# Altium PCB ej_2.PcbDoc
Units mm, origin at the board's own origin, x right, y up, seen from the top; angles counter-clockwise.
Board outline 99.95 x 100.08 mm, 2 copper layers (Top Layer, Bottom Layer); 15 components, 22 nets, 112 pads, 0 vias.
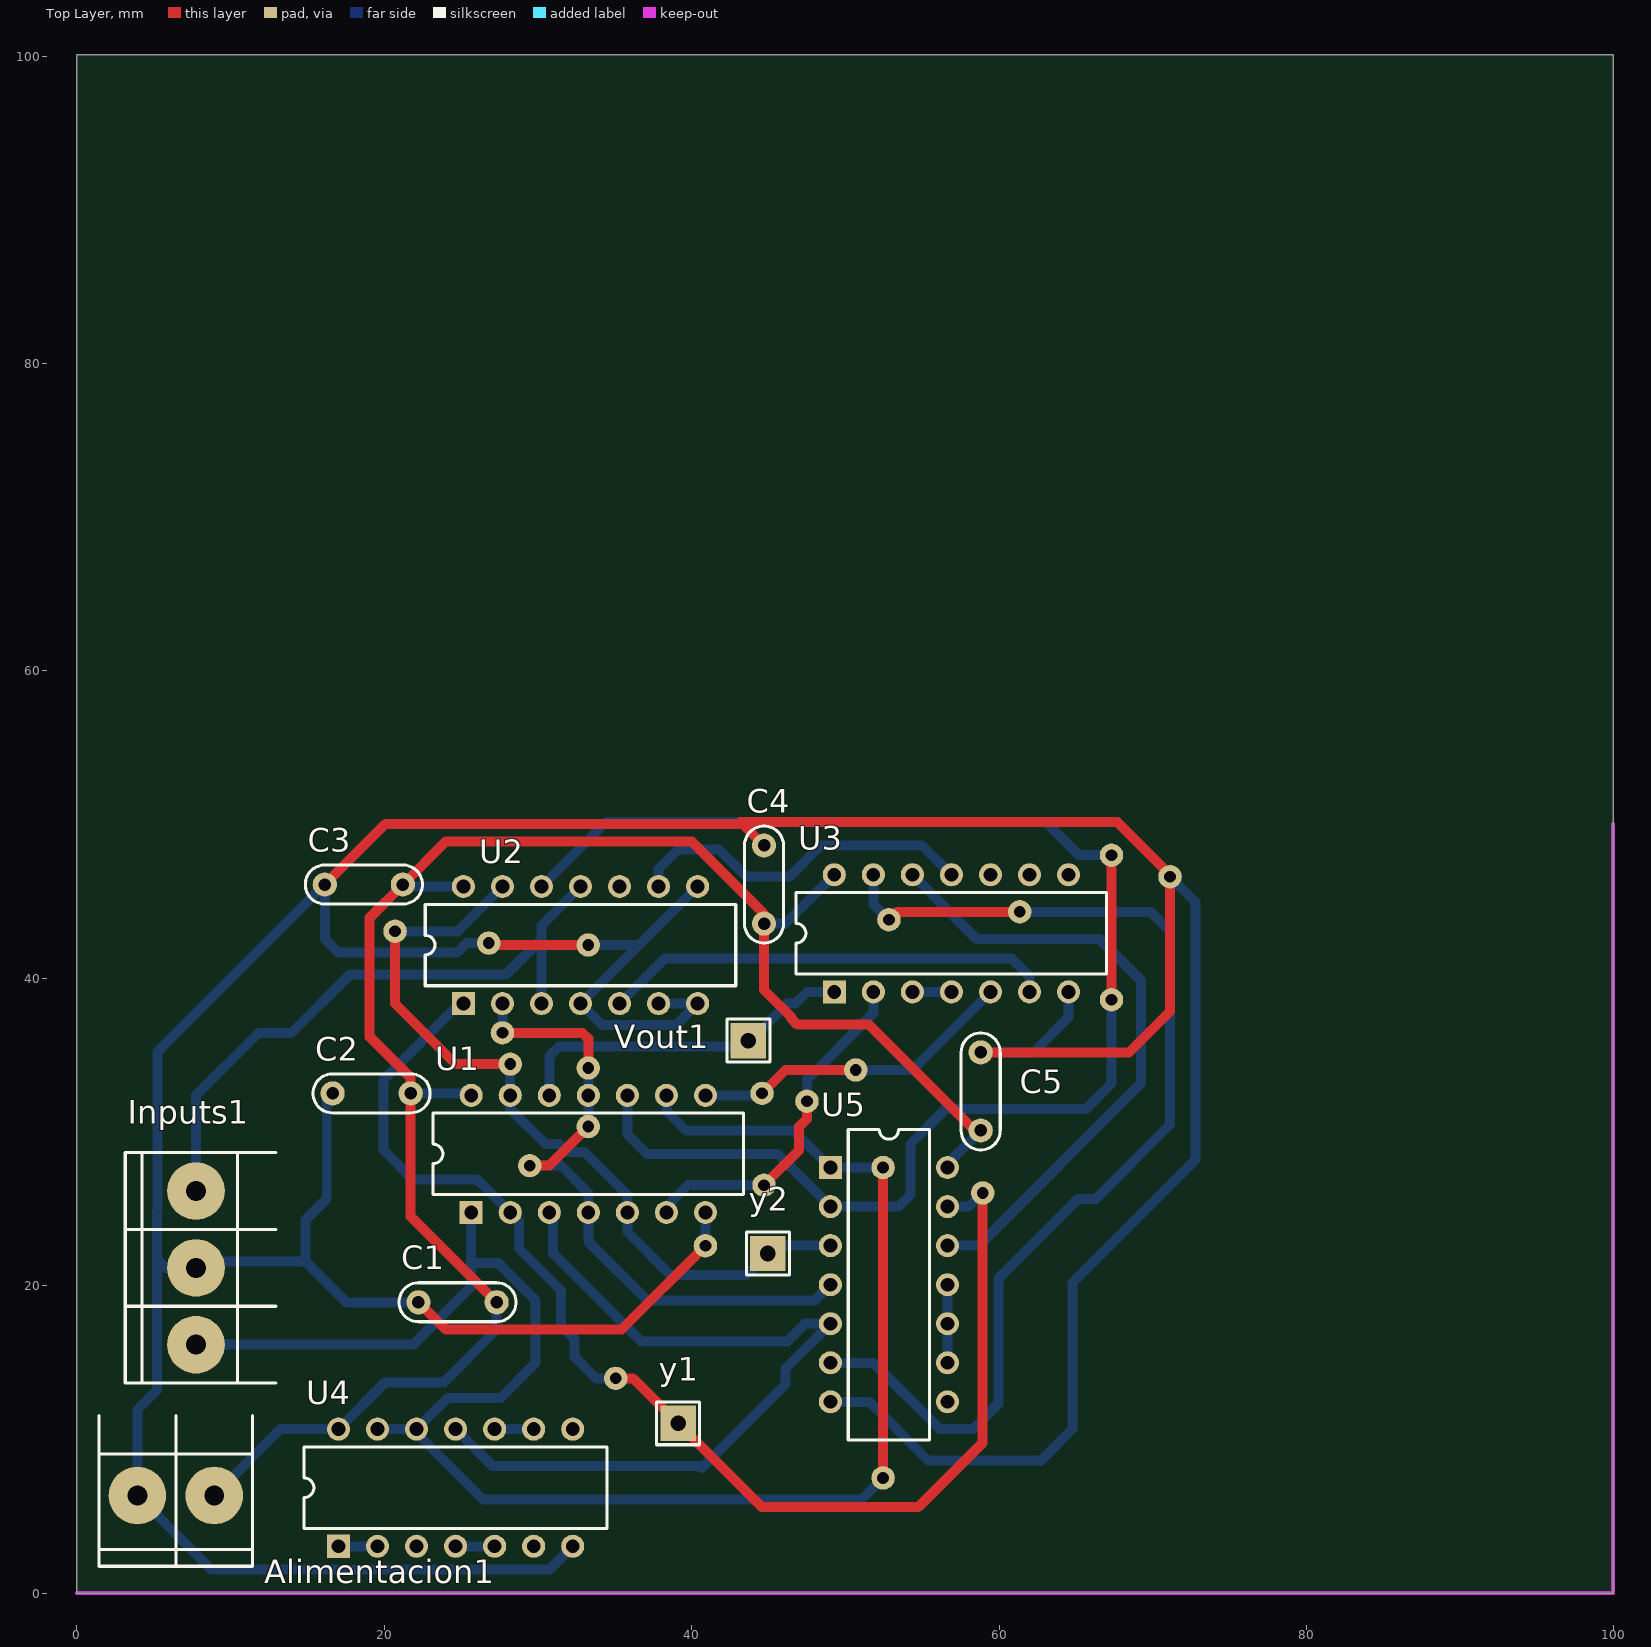
[diagram p0: Top Layer view]
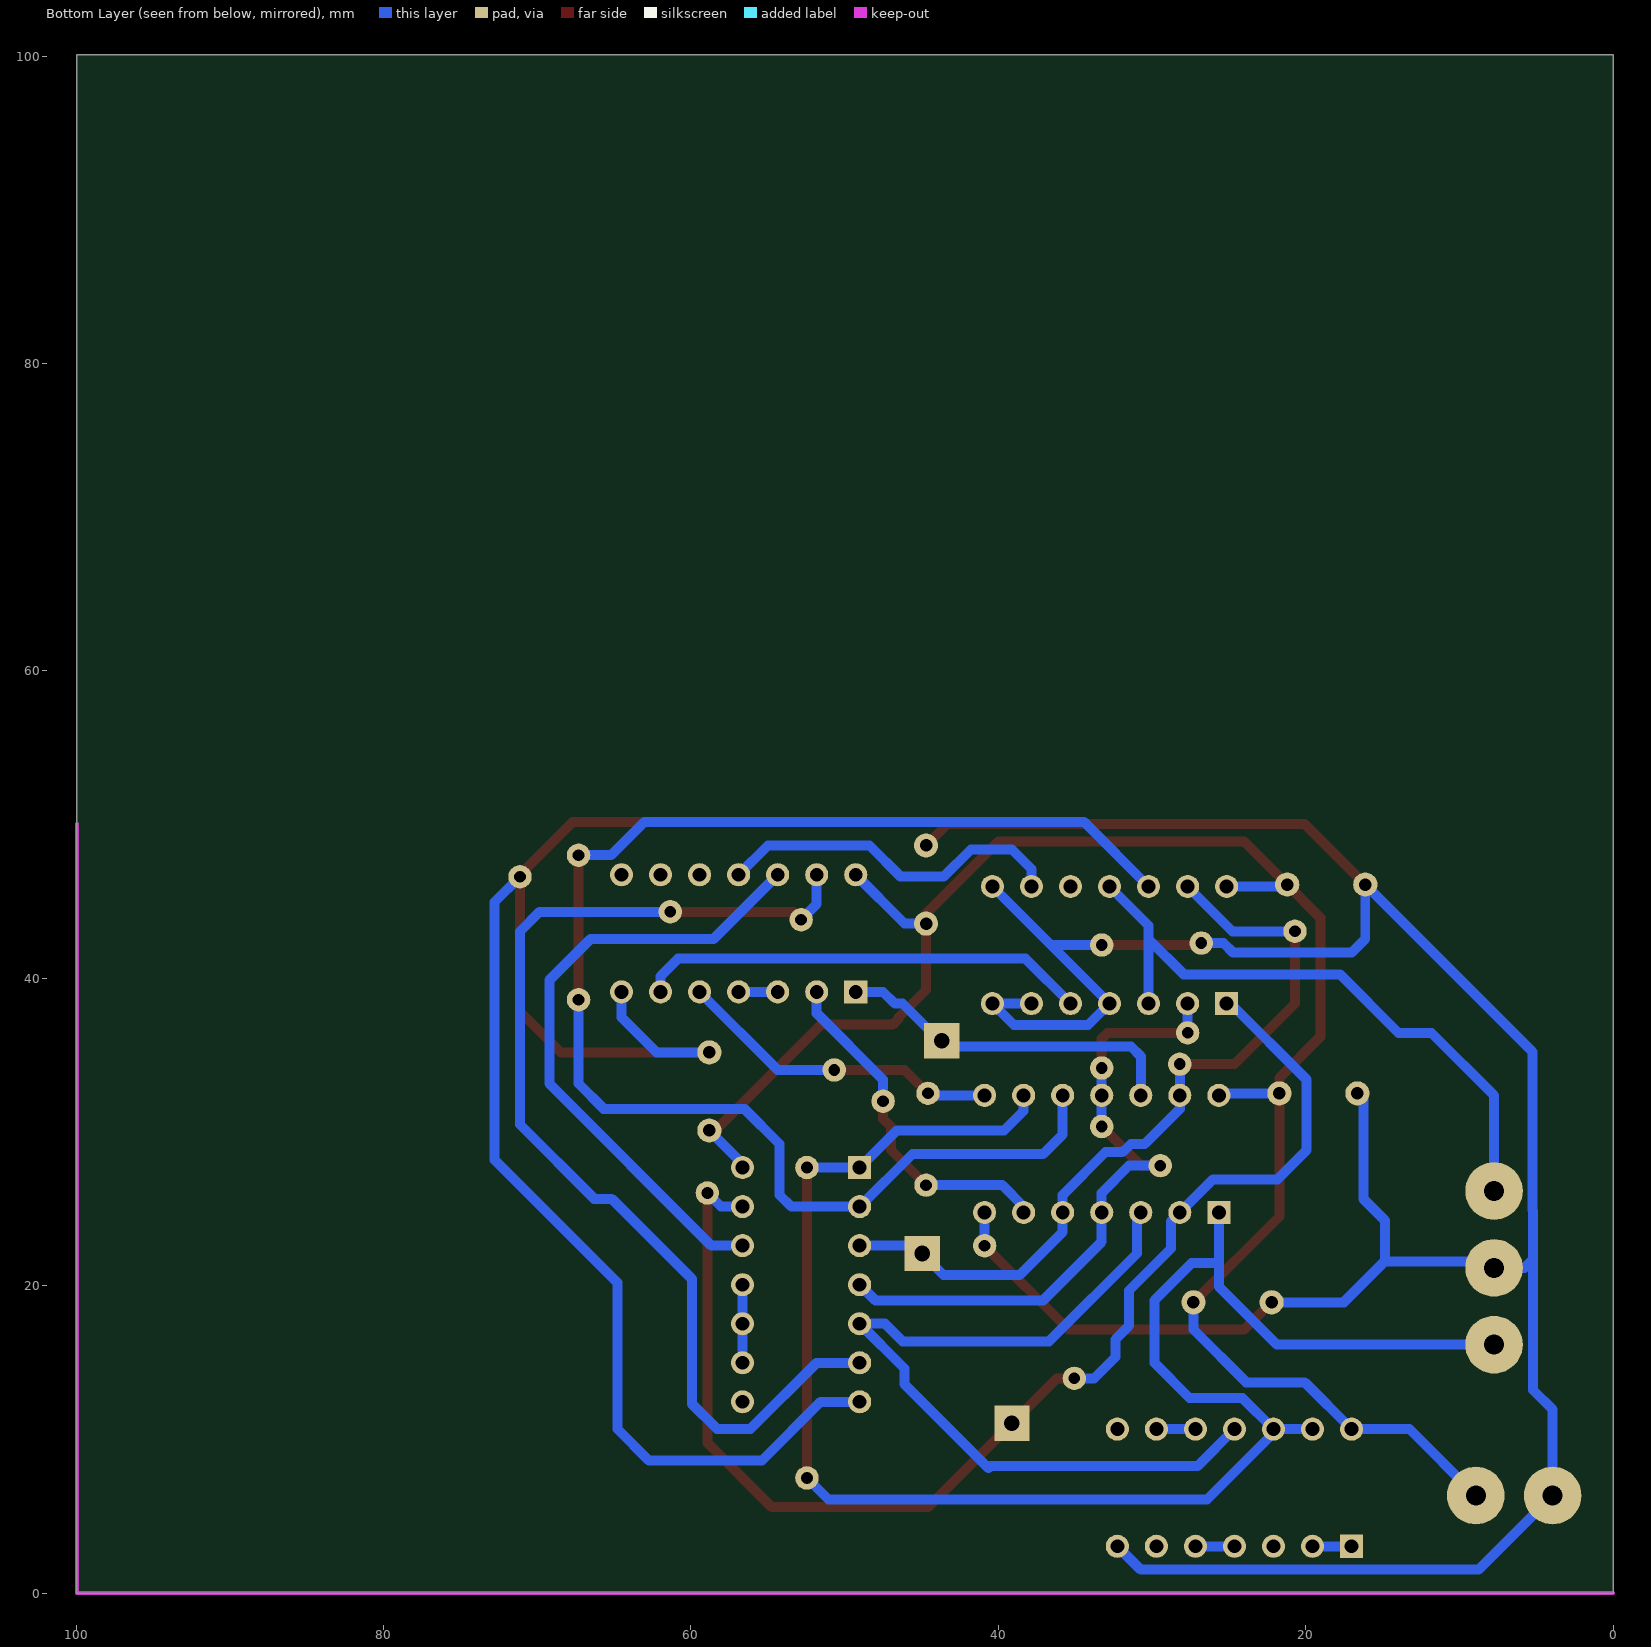
[diagram p1: Bottom Layer view, seen from below]
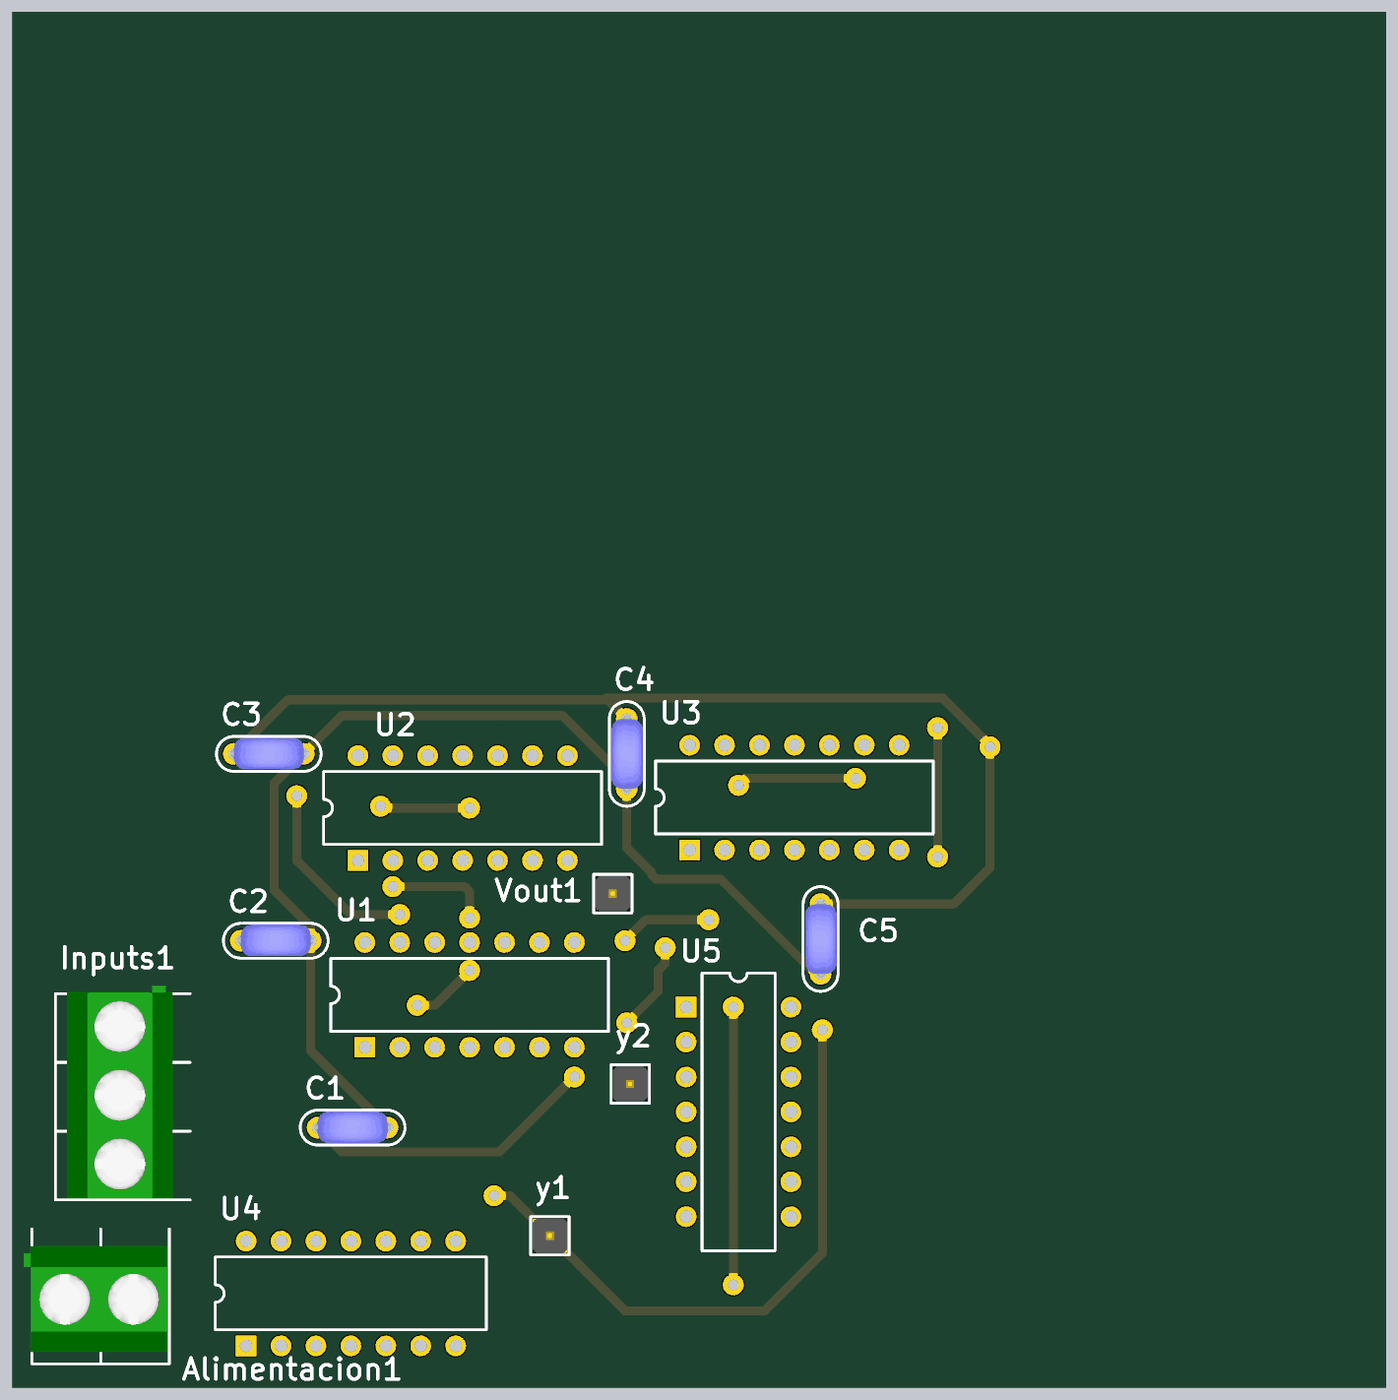
[diagram p2: 3D render of the assembled board from above, using the file's embedded part models]

## Layer stack, top to bottom
Top Solder: solder mask 0.0102, Solder Resist, Dk 3.5
Top Layer: signal copper 0.0356
Dielectric 1: dielectric 0.32, FR-4, Dk 4.8
Bottom Layer: signal copper 0.0356
Bottom Solder: solder mask 0.0102, Solder Resist, Dk 3.5

## Board outline
0,0 99.949,0 99.949,100.076 0,100.076

## Design rules (kind name [scope] priority, off if disabled: settings)
Clearance [All] p1: gap=0.3 ignorepadtopadclearanceinfootprint=FALSE
PolygonConnect [All] p1: connectstyle=Relief reliefconductorwidth=0.254 reliefentries=4 polygonreliefangle="90 Angle" airgapwidth=0.254
RoutingVias [All] p1: holewidth=0.5 width=2 viastyle="Through Hole" minholewidth=0.5 minwidth=2 maxholewidth=0.5 maxwidth=2
SolderMaskExpansion [All] p1: expansion=0.102
Width [All] p1: maxlimit=0.65 minlimit=0.65 preferedwidth=0.65
30 further rules are at their usual default settings.

## Components (designator, comment, footprint, x,y, rotation, side; value= is the part's Value field where it differs from the comment)
Alimentacion1 "Alimentacion" BORNERA2 6.437,6.35 r90 top
C1 "CAP" CAP200 24.765,18.923 r180 top
C2 "CAP" CAP200 19.177,32.512 r180 top
C3 "CAP" CAP200 18.669,46.101 r180 top
C4 "CAP" CAP200 44.704,46.101 r90 top
C5 "CAP" CAP200 58.801,32.639 r90 top
Inputs1 "BORNERA 3" BORNERA3 7.747,21.162 r0 top
U1 "M74HC11B1R" DIP14 33.274,28.575 r0 top
U2 "HCC4013BF" CDIP14 32.766,42.164 r0 top
U3 "M74HC32B1R" DIP14 56.896,42.926 r0 top
U4 "SN74AHC00N" N014 24.638,6.858 r0 top
U5 "M74HC11B1R" DIP14 52.832,20.066 r270 top
Vout1 "Vout" TPTH 43.688,35.941 r0 top
y1 "y1_now" TPTH 39.116,11.049 r0 top
y2 "y2_now" TPTH 44.958,22.098 r0 top

## Footprints (in the part's own frame and the unit in brackets; to place one, negate y for a bottom-side part, rotate by r counter-clockwise, add the part's x,y. Pads: shape width x height; smd on the part's side, far side on the other; paste and mask are expansions set on the pad)
BORNERA2 [mm] "Bornera con Tornillos 5mm separación"
  round 3.75 hole 1.3: 1(0,2.5) 2(0,-2.5)
  silkscreen extent -4.6,-5 5.2,5, body extent -3.76,-4.89 3.94,5.61, height 10
BORNERA3 [mm] "Bornera con Tornillos 5mm separación"
  round 3.75 hole 1.3: 1(0,5) 2(0,0) 3(0,-5)
  silkscreen extent -4.6,-7.5 5.2,7.5, body extent -3.76,-7.39 3.94,8.11, height 10.05
CAP200 [mil]
  round 62 hole 32: 1(-100,0) 2(100,0)
  silkscreen extent -150,-50 150,50, body extent -110,-46 110,44, height 246
CDIP14 [mm] "DIP; 14 Leads; Row Spacing 7.62 mm; Pitch 2.54 mm"
  rect 1.5x1.5 hole 0.9: 1(-7.62,-3.81)
  round 1.5 hole 0.9: 2(-5.08,-3.81) 3(-2.54,-3.81) 4(0,-3.81) 5(2.54,-3.81) 6(5.08,-3.81) 7(7.62,-3.81) 8(7.62,3.81) 9(5.08,3.81) 10(2.54,3.81) 11(0,3.81) 12(-2.54,3.81) 13(-5.08,3.81) 14(-7.62,3.81)
  silkscreen extent -10.1,-2.65 10.1,2.65
DIP14 [mm] "DIP; 14 Leads; Row Spacing 7.62 mm; Pitch 2.54 mm"
  rect 1.5x1.5 hole 0.9: 1(-7.62,-3.81)
  round 1.5 hole 0.9: 2(-5.08,-3.81) 3(-2.54,-3.81) 4(0,-3.81) 5(2.54,-3.81) 6(5.08,-3.81) 7(7.62,-3.81) 8(7.62,3.81) 9(5.08,3.81) 10(2.54,3.81) 11(0,3.81) 12(-2.54,3.81) 13(-5.08,3.81) 14(-7.62,3.81)
  silkscreen extent -10.1,-2.65 10.1,2.65
N014 [mm] "DIP; 14 Leads; Row Spacing 7.62 mm; Pitch 2.54 mm"
  rect 1.5x1.5 hole 0.9: 1(-7.62,-3.81)
  round 1.5 hole 0.9: 2(-5.08,-3.81) 3(-2.54,-3.81) 4(0,-3.81) 5(2.54,-3.81) 6(5.08,-3.81) 7(7.62,-3.81) 8(7.62,3.81) 9(5.08,3.81) 10(2.54,3.81) 11(0,3.81) 12(-2.54,3.81) 13(-5.08,3.81) 14(-7.62,3.81)
  silkscreen extent -9.85,-2.65 9.85,2.65
TPTH [mm]
  rect 2.3x2.3 hole 1.016: 1(0,0)
  silkscreen extent -1.4,-1.4 1.4,1.4, body extent -1.27,-1.27 1.27,1.27, height 6.04

## Part data
Alimentacion1: library part "BORNERA 2"
U1 U5: "Triple 3-Input AND Gate", ComponentLink1Description="Manufacturer Link", ComponentLink1URL=http://www.st.com/, ComponentLink2Description=Datasheet, ComponentLink2URL=http://www.st.com/stonline/products/literature/ds/1890/m74hc11.pdf, DatasheetVersion=Feb-1993, LatestRevisionDate=06-Jun-2005, LatestRevisionNote="Stylized 3D Model Added.", PackageDescription="DIP; 14 Leads; Row Spacing 7.62 mm; Pitch 2.54 mm", PackageReference=DIP14, PackageVersion=Jan-1997, Published=8-Jun-2000, Publisher="Altium Limited"
U2: "Dual D-Type Flip-Flop", ComponentLink1Description="Manufacturer Link", ComponentLink1URL=http://www.st.com/, DatasheetVersion=Jun-1989, LatestRevisionDate=06-Jun-2005, LatestRevisionNote="Stylized 3D Model Added.", PackageDescription="DIP; 14 Leads; Row Spacing 7.62 mm; Pitch 2.54 mm", PackageReference=CDIP14, Published=8-Jun-2000, Publisher="Altium Limited"
U3: "Quad 2-Input OR Gate", ComponentLink1Description="Manufacturer Link", ComponentLink1URL=http://www.st.com/, ComponentLink2Description=Datasheet, ComponentLink2URL=http://www.st.com/stonline/products/literature/ds/1944/m74hc32.pdf, DatasheetVersion=Dec-1992, LatestRevisionDate=06-Jun-2005, LatestRevisionNote="Stylized 3D Model Added.", PackageDescription="DIP; 14 Leads; Row Spacing 7.62 mm; Pitch 2.54 mm", PackageReference=DIP14, PackageVersion=Jan-1997, Published=8-Jun-2000, Publisher="Altium Limited"
U4: "Quadruple 2-Input Positive-NAND Gate", ComponentLink1Description="Manufacturer Link", ComponentLink1URL=http://www.ti.com/, ComponentLink2Description=Datasheet, ComponentLink2URL=http://www-s.ti.com/sc/ds/sn74ahc00.pdf, ComponentLink3Description="Packaging Specification", ComponentLink3URL=http://focus.ti.com/lit/ml/mpdi002c/mpdi002c.pdf, DatasheetVersion=Jun-1998, LatestRevisionDate=04-Mar-2005, LatestRevisionNote="Stylized 3D Model Added.", PackageDescription="DIP; 14 Leads; Row Spacing 7.62 mm; Pitch 2.54 mm", PackageReference=N014, PackageVersion=Oct-1995, Published=8-Jun-2000, Publisher="Altium Limited"
Vout1 y1 y2: library part TP

## Free pads (board coordinates)
  round 1.524 hole 0.762: 12(33.274,34.163) 13(27.686,36.449) 14(28.194,34.417) 15(20.701,43.053) 16(20.701,43.053) 17(44.577,32.512) 18(50.673,34.036) 19(44.704,26.543) 20(47.498,32.004) 21(52.451,7.493) 22(52.451,27.686) 23(29.464,27.813) 25(33.274,30.353) 26(67.31,38.608) 27(67.31,48.006) 28(33.274,42.164) 29(26.797,42.291) 30(58.928,26.035) 31(35.052,13.97) 32(35.052,13.97) 33(40.894,22.606) 34(52.832,43.815) 35(61.341,44.323) 36(71.12,46.609)

## Nets (pads, with @x,y where several pads share a name; then routed paths per layer and width w, separated by ;. In a path a pad name is that pad's centre, name@x,y a point inside that pad or via, vN(x,y) a via of type N, cw(c..) or ccw(c..) an arc to the next point about the centre after c; other vN are vias at no path point)
CLK: Inputs1.1 U2.3 U2.11 | length 41.6
  Bottom Layer w0.65: Inputs1.1 7.747,32.385 11.811,36.449 13.97,36.449 17.78,40.259 27.94,40.259 30.226,42.545 ; U2.3 30.226,42.545 ; U2.11 30.226,43.434 30.226,42.545
GND: Alimentacion1.1 C1.2 C2.2 C3.2 C4.2 C5.2 Inputs1.2 pad.28 pad.29 pad.33 pad.36 U1.7 U2.4 U2.6 U2.7 U2.8 U3.7 U4.7 U5.7 | length 325.3
  Top Layer w0.65: C3.2 20.066,50.038 43.307,50.038 ; C1.2 24.003,17.145 35.433,17.145 pad.33 ; pad.29 26.924,42.164 pad.28 ; C4.2 43.307,50.038 ; C5.2 68.453,35.179 71.12,37.846 pad.36 71.12,46.736 67.691,50.165 43.18,50.165 43.307,50.038
  Bottom Layer w0.65: C2.2 16.256,32.131 16.256,25.654 14.859,24.257 14.859,21.59 ; C1.2 17.526,18.923 14.859,21.59 ; pad.29 25.347,42.291 24.722,41.666 17.028,41.666 16.129,42.565 C3.2 5.247,35.219 5.247,24.912 5.207,24.872 5.207,21.717 ; U4.7 30.734,1.524 8.763,1.524 Alimentacion1.1 3.937,11.938 5.207,13.208 5.207,21.717 ; pad.28 36.576,42.164 ; U2.6 U2.7 38.989,36.957 34.163,36.957 U2.4 36.576,42.164 ; U2.8 36.576,42.164 ; pad.33@40.767,22.987 40.894,23.114 U1.7 ; U5.7 51.562,12.446 55.372,8.636 62.738,8.636 64.77,10.668 64.77,20.193 72.771,28.194 72.771,44.958 pad.36 ; C5.2 62.23,35.179 64.516,37.465 U3.7 ; 5.207,21.717 5.762,21.162 Inputs1.2 8.175,21.59 14.859,21.59
Input: Inputs1.3 pad.21 pad.22 U1.1 U1.9 U4.12 U4.13 U5.1 | length 115.4
  Top Layer w0.65: pad.21 pad.22
  Bottom Layer w0.65: Inputs1.3 21.877,16.162 25.654,19.939 25.654,21.463 ; U4.13 U4.12 ; U1.1 25.654,21.463 ; U1.9 38.354,31.369 39.624,30.099 46.609,30.099 U5.1 pad.22 ; pad.21 51.054,6.096 26.416,6.096 22.098,10.414 U4.12 ; U4.12 24.13,12.7 27.559,12.7 29.845,14.986 29.845,19.05 27.432,21.463 25.654,21.463
NetU1_6: pad.19 pad.20 U1.6 U3.2 | length 22.8
  Top Layer w0.65: pad.19 46.99,28.829 46.99,30.353 47.498,30.861 pad.20
  Bottom Layer w0.65: U1.6 38.354,25.146 39.751,26.543 pad.19 ; pad.20 47.498,33.401 51.816,37.719 U3.2
NetU1_8: pad.17 pad.18 U1.8 U3.5 | length 21.4
  Top Layer w0.65: pad.17 46.101,34.036 pad.18
  Bottom Layer w0.65: U1.8 pad.17@44.704,32.385 ; pad.18 54.356,34.036 U3.5
NetU1_12: U1.12 U3.1 Vout1.1 | length 22.8
  Bottom Layer w0.65: U1.12 30.734,34.925 31.369,35.56 43.434,35.56 46.228,38.354 46.736,38.354 47.498,39.116 U3.1
NetU2_5: U2.5 U3.6 | length 29.4
  Bottom Layer w0.65: U2.5 38.227,41.275 60.833,41.275 61.976,40.132 U3.6
NetU2_9: U2.9 U3.11 | length 23.1
  Bottom Layer w0.65: U2.9 37.846,47.117 39.116,48.387 41.783,48.387 43.561,46.609 46.355,46.609 48.387,48.641 54.991,48.641 U3.11
NetU3_3: U3.3 U3.4 | length 2.5
  Bottom Layer w0.65: U3.3 U3.4
NetU3_12: U3.12 U5.12 | length 41.4
  Bottom Layer w0.65: U3.12 58.547,42.545 66.548,42.545 69.215,39.878 69.215,33.147 58.674,22.606 U5.12
NetU3_13: pad.34 pad.35 U3.13 U5.6 | length 71.8
  Top Layer w0.65: pad.34 53.34,44.323 pad.35
  Bottom Layer w0.65: U5.6 51.816,14.986 56.134,10.668 58.293,10.668 59.944,12.319 59.944,20.447 65.151,25.654 66.294,25.654 71.12,30.48 71.12,43.053 69.85,44.323 pad.35 ; U3.13 51.816,44.831 pad.34
NetU4_1: U4.1 U4.2 | length 2.5
  Bottom Layer w0.65: U4.1 U4.2
NetU4_4: U4.4 U4.5 | length 2.5
  Bottom Layer w0.65: U4.4 U4.5
NetU4_9: U4.9 U4.10 | length 2.5
  Bottom Layer w0.65: U4.10 U4.9
NetU5_9: U5.9 U5.10 U5.11 | length 5.1
  Bottom Layer w0.65: U5.9 U5.10 U5.11
Not_input: U1.3 U4.11 U5.5 | length 53.6
  Bottom Layer w0.65: U4.11 27.051,8.255 40.513,8.255 40.64,8.128 46.101,13.589 46.101,14.605 U5.5 47.371,17.526 46.228,16.383 36.703,16.383 30.988,22.098 30.988,24.511 U1.3
not_y1: pad.12 pad.13 pad.23 pad.25 U1.4 U1.11 U2.2 U5.4 | length 43.2
  Top Layer w0.65: pad.13 32.893,36.449 33.274,36.068 pad.12 ; pad.23 30.734,27.813 pad.25
  Bottom Layer w0.65: pad.13 U2.2 ; pad.23 31.496,27.813 33.274,26.035 U1.4 33.274,22.86 37.084,19.05 48.006,19.05 U5.4 ; pad.25 U1.11 pad.12@33.274,33.655
not_y2: pad.26 pad.27 U1.10 U2.12 U5.2 | length 95.9
  Top Layer w0.65: pad.26 pad.27
  Bottom Layer w0.65: U2.12@30.226,46.101 U2.12 34.417,50.165 63.032,50.165 65.191,48.006 pad.27 ; U1.10 35.814,29.845 37.084,28.575 45.593,28.575 U5.2 53.467,25.146 54.229,25.908 54.229,29.21 56.53,31.511 65.674,31.511 67.31,33.147 pad.26
VCC: Alimentacion1.2 C1.1 C2.1 C3.1 C4.1 C5.1 U1.14 U2.14 U3.14 U4.14 U5.14 | length 122.8
  Top Layer w0.65: C1.1 21.717,24.511 C2.1 21.717,33.528 19.05,36.195 19.05,43.942 C3.1 24.003,48.895 40.005,48.895 44.704,44.196 C4.1 44.704,39.243 46.504,37.443 46.504,37.345 46.87,36.979 51.54,36.979 58.42,30.099 C5.1
  Bottom Layer w0.65: Alimentacion1.2 13.255,10.668 U4.14 20.066,13.716 23.876,13.716 27.305,17.145 C1.1 ; C3.1 21.336,45.974 U2.14 ; C2.1 25.527,32.512 U1.14 ; C4.1 46.101,43.561 U3.14 ; U5.14 56.642,27.94 C5.1
VDD: 
y1: pad.30 pad.31 pad.32 U1.2 U2.1 U5.13 y1.1 | length 84
  Top Layer w0.65: pad.32 36.195,13.97 y1.1 44.577,5.588 54.737,5.588 58.928,9.779 pad.30
  Bottom Layer w0.65: U2.1 24.892,38.354 19.939,33.401 19.939,28.829 21.844,26.924 26.035,26.924 U1.2 28.765,24.194 28.765,22.415 31.496,19.685 31.496,17.399 32.385,16.51 32.385,15.367 33.782,13.97 pad.32@34.925,13.97 ; U5.13 58.039,25.146 pad.30
y2: pad.14 pad.15 pad.16 U1.5 U1.13 U2.13 U5.3 y2.1 | length 52.4
  Top Layer w0.65: pad.16 20.701,38.354 24.638,34.417 pad.14
  Bottom Layer w0.65: pad.16 24.765,43.053 U2.13 ; pad.14 U1.13 28.194,31.496 30.48,29.21 31.369,29.21 31.816,28.763 31.89,28.763 31.951,28.702 33.02,28.702 35.814,25.908 U1.5 35.814,23.495 38.608,20.701 43.561,20.701 y2.1 45.466,22.606 U5.3
pads on no net: U2.10 U3.8 U3.9 U3.10 U4.3 U4.6 U4.8 U5.8

## Keep-outs
Keep-Out Layer:
  lines w0.254: 0,0 99.949,0 ; 99.949,0.051 99.949,50.038